# Altium PCB Main Board.PcbDoc (part 1 of 2)
Units mm, origin at the board's own origin, x right, y up, seen from the top; angles counter-clockwise.
Board outline 54.5 x 80 mm, 2 copper layers (Top Layer, Bottom Layer), stack 1.671 mm thick; 106 components, 102 nets, 471 pads, 251 vias.
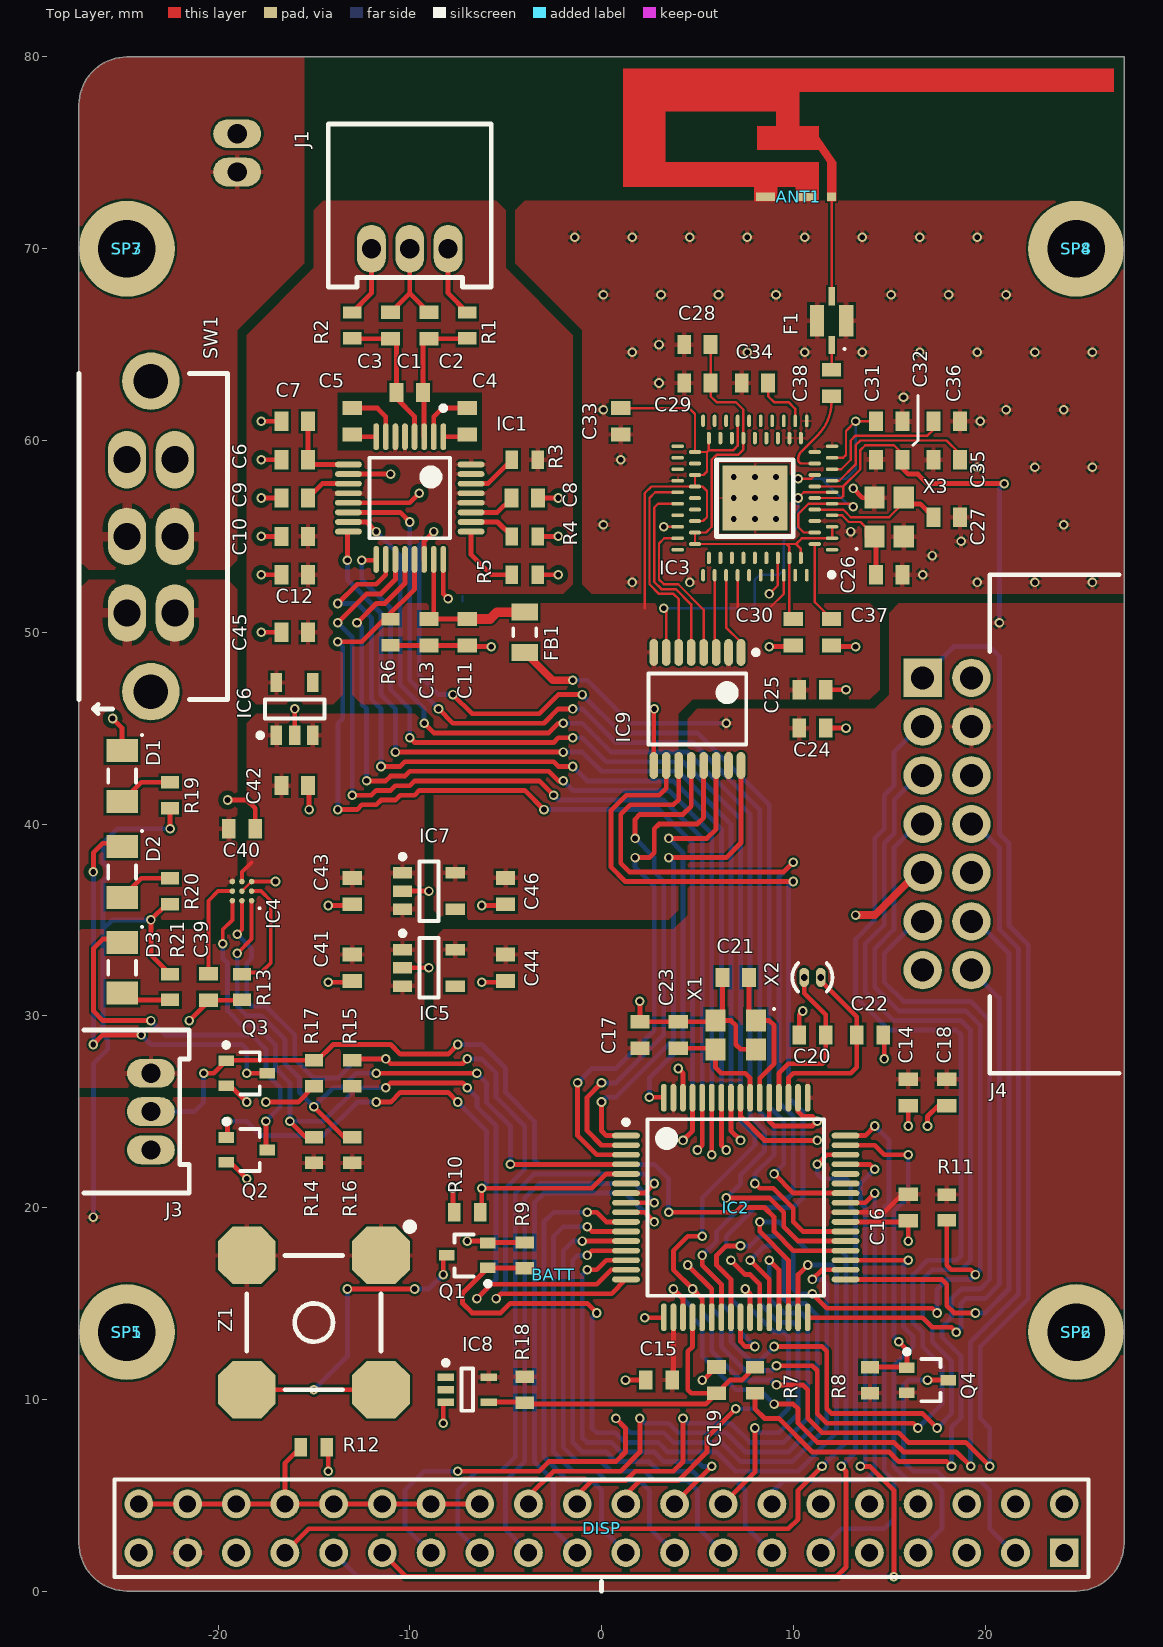
[diagram p0: Top Layer view]
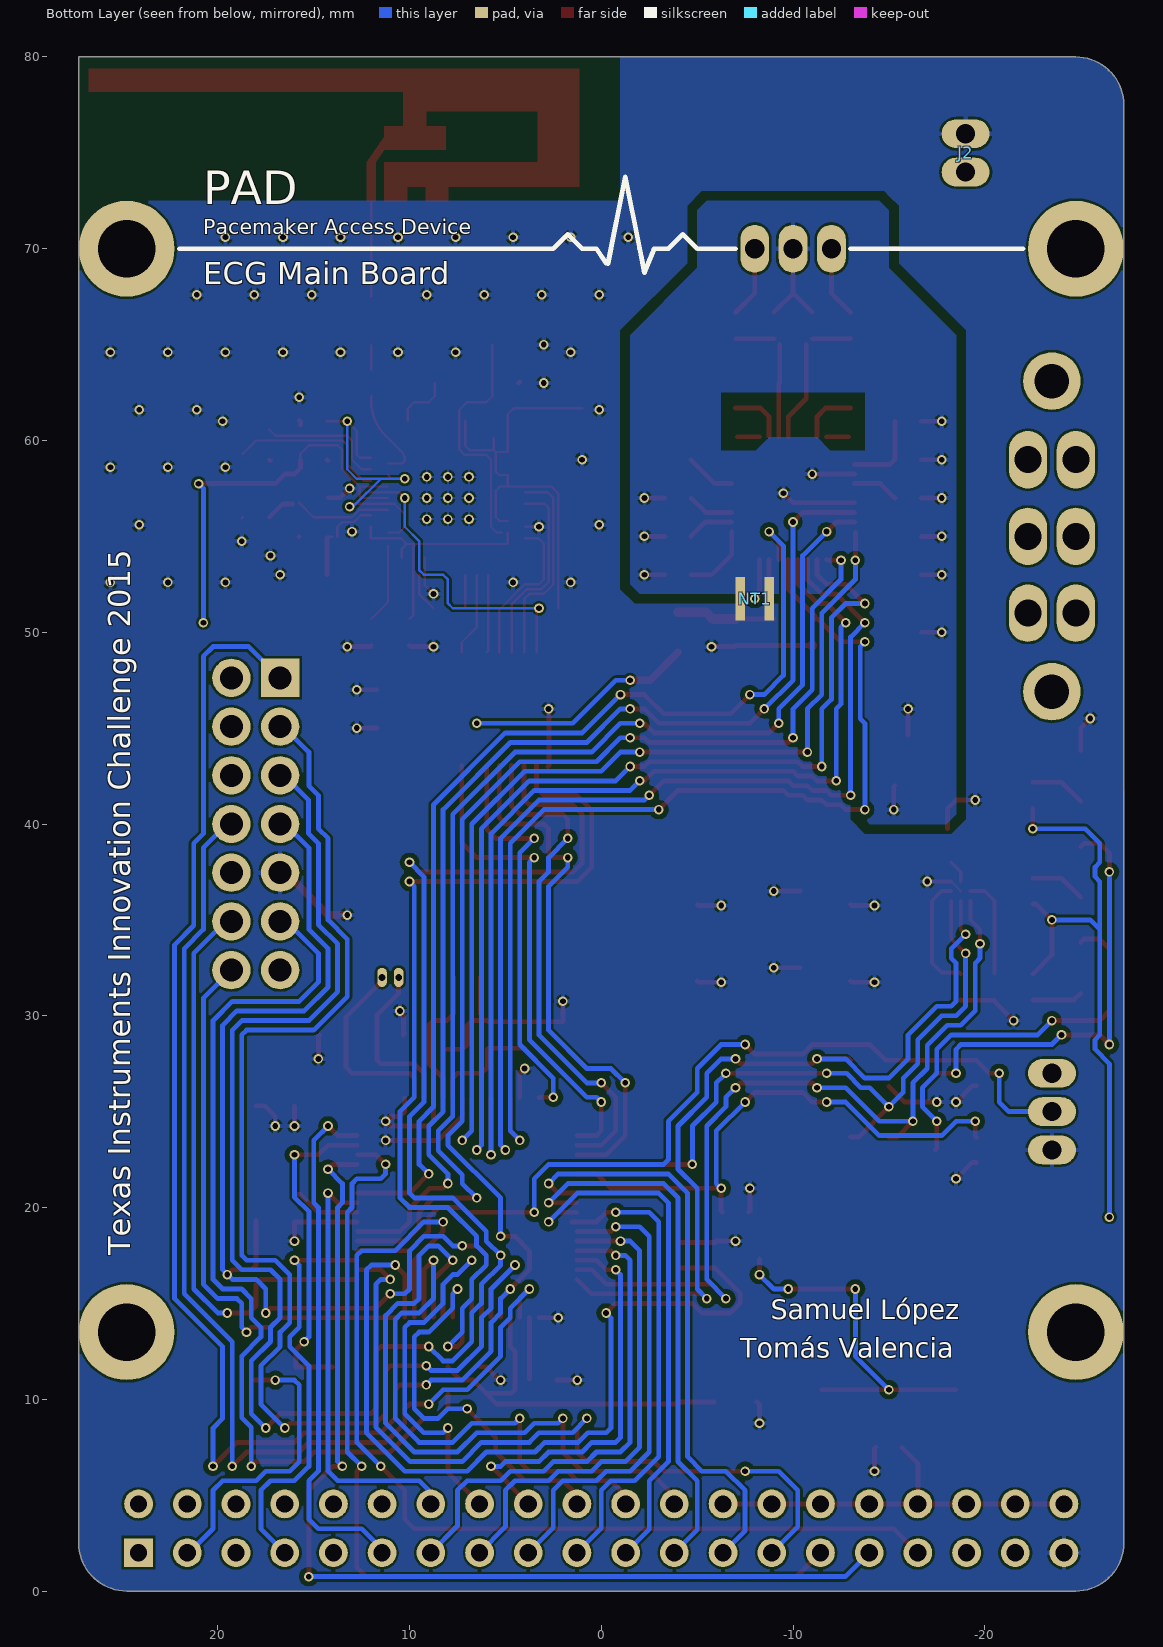
[diagram p1: Bottom Layer view, seen from below]

## Layer stack, top to bottom
Top Solder: solder mask 0.0102, Solder Resist, Dk 3.5
Top Layer: signal copper 0.0356
Dielectric 1: dielectric 1.6, FR-4, Dk 4.8
Bottom Layer: signal copper 0.0356
Bottom Solder: solder mask 0.0102, Solder Resist, Dk 3.5

## Board outline
-27.25,2.5 ccw(c-24.75,2.5) -24.75,0 24.75,0 ccw(c24.75,2.5) 27.25,2.5 27.25,80 -24.75,80 ccw(c-24.75,77.5) -27.25,77.5

## Design rules (kind name [scope] priority, off if disabled: settings)
Clearance ClearanceFuelGauge [(InNet('BIN') OR InNet('VBUS'))] p1: gap=0.125
Clearance ClearanceTrackPolygon [IsTrack vs InPolygon] p2: gap=0.125
Clearance ClearanceBLE [InNetClass('BLE')] p3: gap=0.125
Clearance ClearancePads [IsPad] p4: gap=0.125
Clearance [All] p5: gap=0.25
ComponentClearance [All] p1: gap=0.25 collisioncheckmode=3 verticalgap=0 showdistances=FALSE
Height [All] p1: minheight=0 maxheight=50 prefheight=12.7
HoleSize [All] p1: absolutevalues=TRUE maxlimit=10 minlimit=0.3 maxpercent=80.000 minpercent=20.000
MinimumSolderMaskSliver [All] p1: minsoldermaskwidth=0.1
PlaneClearance [All] p1: clearance=0.25
PlaneConnect [All] p1: planeconnectstyle=Relief reliefexpansion=0.25 reliefentries=4 reliefconductorwidth=0.25 reliefairgap=0.25
PolygonConnect PolygonConnectANT [InComponent('ANT1')] p1: connectstyle=Direct reliefconductorwidth=0.25 reliefentries=4 polygonreliefangle="90 Angle" airgapwidth=0.25
PolygonConnect PolygonConnectAGNDDGND [InComponent('NT1')] p2: connectstyle=Direct reliefconductorwidth=0.25 reliefentries=4 polygonreliefangle="90 Angle" airgapwidth=0.25
PolygonConnect PolygonConnectBATT [InComponent('SW1')] p3: connectstyle=Relief reliefconductorwidth=0.5 reliefentries=4 polygonreliefangle="90 Angle" airgapwidth=0.25
PolygonConnect PolygonConnectRF [InComponent('IC3')] p4: connectstyle=Relief reliefconductorwidth=0.125 reliefentries=4 polygonreliefangle="90 Angle" airgapwidth=0.125
PolygonConnect [All] p5: connectstyle=Relief reliefconductorwidth=0.25 reliefentries=4 polygonreliefangle="90 Angle" airgapwidth=0.125
RoutingVias [All] p1: holewidth=0.3 width=0.5 viastyle="Through Hole" minholewidth=0.3 minwidth=0.5 maxholewidth=8 maxwidth=10
SilkToSilkClearance [All] p1: silktosilkclearance=0.1
SilkToSolderMaskClearance [IsPad] p1: minsilkscreentomaskgap=0.1 clearancetoexposedcopper=TRUE
SolderMaskExpansion [All] p1: expansion=0.102
UnpouredPolygon [All] p1: allowunpoured=FALSE
Width [All] p1: maxlimit=2.5 minlimit=0.125 preferedwidth=0.25
21 further rules are at their usual default settings.

## Classes and differential pairs
component class U_Mechanical: SP1 SP2 SP3 SP4 SP5 SP6 SP7 SP8
component class "Main Board": ANT1
component class U_AFE: C1 C2 C3 C4 C5 C6 C7 C8 C9 C10 C11 C12 C13 IC1 J1 NT1 R1 R2 R3 R4 R5 R6
component class U_MCU: C14 C15 C16 C17 C18 C19 C20 C21 C22 C23 D3 DISP IC2 J4 Q1 Q2 Q4 R7 R8 R9 R10 R11 R12 R21 X1 X2 Z1
component class U_RF: C24 C25 C26 C27 C28 C29 C30 C31 C32 C33 C34 C35 C36 C37 C38 F1 IC3 IC9 X3
component class U_Supply: C39 C40 C41 C42 C43 C44 C45 C46 D1 D2 FB1 IC4 IC5 IC6 IC7 IC8 J2 J3 Q3 R13 R14 R15 R16 R17 R18 R19 R20 SW1
net class BLE: ACLK_RF_RFVDD ANTENNA DVDD NetC31_2 NetC35_2 NetC36_2 NetC37_2 NetC38_2 NetIC3_A26 NetIC3_A29 NSHUTD_RFVDD RF RF_CLKM RF_CLKP RFVDD

## Components (designator, comment, footprint, x,y, rotation, side; value= is the part's Value field where it differs from the comment)
ANT1 "2.4 GHz F-antenna" ANTENNA 12,72.715 r0 top net-tie
BATT "Batt" BATT -2.5,16.5 r180 top
C1 "6.8n" C0603 -10,62.5 r0 top
C2 "47p" C0603 -9,66 r270 top
C3 "47p" C0603 -11,66 r90 top
C4 "4.7n" C0603 -7,61 r270 top
C5 "4.7n" C0603 -13,61 r90 top
C6 "10u" C0603 -16,59 r0 top
C7 "0.1u" C0603 -16,61 r0 top
C8 "1u" C0603 -4,57 r180 top
C9 "1u" C0603 -16,57 r0 top
C10 "1u" C0603 -16,55 r0 top
C11 "1u" C0603 -7,50 r90 top
C12 "0.1u" C0603 -16,53 r0 top
C13 "0.1u" C0603 -9,50 r90 top
C14 "100n" C0603 16,26 r90 top
C15 "100n" C0603 3,11 r0 top
C16 "100n" C0603 16,20 r90 top
C17 "100n" C0603 2,29 r270 top
C18 "10u" C0603 18,26 r90 top
C19 "2.2n" C0603 6,11 r270 top
C20 "15p" C0603 11,29 r180 top
C21 "8p" C0603 7,32 r0 top
C22 "15p" C0603 14,29 r0 top
C23 "8p" C0603 4,29 r270 top
C24 "0.1u" C0603 11,45 r180 top
C25 "0.1u" C0603 11,47 r180 top
C26 "12p" C0603 15,53 r180 top
C27 "12p" C0603 18,56 r180 top
C28 "0.47u" C0603 5,65 r0 top
C29 "0.47u" C0603 5,63 r0 top
C30 "0.1u" C0603 10,50 r90 top
C31 "1u" C0603 15,61 r180 top
C32 "1u" C0603 15,59 r0 top
C33 "0.1u" C0603 1,61 r90 top
C34 "0.1u" C0603 8,63 r0 top
C35 "0.1u" C0603 18,59 r0 top
C36 "0.1u" C0603 18,61 r180 top
C37 "0.1u" C0603 12,50 r90 top
C38 "22p" C0603 12,63 r90 top
C39 "0.47u" C0603 -20.5,31.5 r90 top
C40 "1u" C0603 -18.75,39.75 r180 top
C41 "1u" C0603 -13,32.5 r90 top
C42 "1u" C0603 -16,42 r180 top
C43 "1u" C0603 -13,36.5 r90 top
C44 "1u" C0603 -5,32.5 r90 top
C45 "1u" C0603 -16,50 r0 top
C46 "1u" C0603 -5,36.5 r90 top
D1 "LED" LED3015M -25,42.5 r90 top
D2 "LED" LED3015M -25,37.5 r90 top
D3 "LED" LED3015M -25,32.5 r90 top
DISP "Touchscreen" TSCREEN_CONN 0,3.27 r90 top
F1 "RF Filter" LFB212G45SG8A127 12,66.25 r180 top
FB1 "220 ohm 100 Mhz" "0805 IND" -4,50 r90 top
IC1 "ADS1291" TSQFP50P700X700X120-32N -10,57 r270 top locked
IC2 "MSP430FR5972IPMR" MSP430FR5972 7,20 r0 top locked
IC3 "CC2560" CC2560 8,57 r180 top
IC4 "FUEL GUAGE" BQ27421 -18.75,36.5 r180 top
IC5 "LP5907" SOT23 -9,32.5 r0 top
IC6 "LP5907" SOT23 -16,46 r90 top
IC7 "LP5907" SOT23 -9,36.5 r0 top
IC8 "LMS33460" LMS33460 -7,10.5 r0 top
IC9 "TXB0106" TXB0106 5,46 r270 top locked
J1 "Electrodes" "JST PH 3 SOCKET" -10,70 r180 top locked
J2 "Batt" "JST PH 2 SOCKET" -19,75 r270 bottom locked
J3 "Charger" "JST PH 3 SOCKET" -23.5,25 r270 top locked
J4 "JTAG" "JTAG 14 PINS" 16.75,40 r270 top locked
NT1 "Net Tie" "NET TIE (AGND-DGND)" -8,51.75 r180 bottom net-tie
Q1 "2N7002" SOT65P210X110-3N -7,17.5 r180 top (schematic designator Q9)
Q2 "2N7002" SOT65P210X110-3N -18.5,23 r0 top (schematic designator Q10)
Q3 "2N7002" SOT65P210X110-3N -18.5,27 r0 top (schematic designator Q14)
Q4 "BSS84" SOT65P210X110-3N 17,11 r0 top (schematic designator Q5)
R1 "47K" R0603 -7,66 r270 top
R2 "47K" R0603 -13,66 r270 top
R3 "1M" R0603 -4,59 r0 top
R4 "100" R0603 -4,55 r0 top
R5 "100" R0603 -4,53 r0 top
R6 "1K" R0603 -11,50 r90 top
R7 "220" R0603 8,11 r90 top
R8 "10K" R0603 14,11 r270 top
R9 "10K" R0603 -4,17.5 r270 top
R10 "10K" R0603 -7,19.75 r0 top
R11 "10K" R0603 18,20 r90 top
R12 "1K" R0603 -15,7.5 r0 top
R13 "10K" R0603 -18.75,31.5 r90 top
R14 "10K" R0603 -15,23 r270 top
R15 "10K" R0603 -13,27 r270 top
R16 "10K" R0603 -13,23 r270 top
R17 "1.5M" R0603 -15,27 r90 top
R18 "470K" R0603 -4,10.5 r90 top
R19 "2.2K" R0603 -22.5,41.5 r270 top
R20 "2.2K" R0603 -22.5,36.5 r270 top
R21 "2.2K" R0603 -22.5,31.5 r90 top
SP1 "Spacer" "SPACER 11MM M3X0.5" -24.75,13.5 r90 top
SP2 "Spacer" "SPACER 11MM M3X0.5" 24.75,13.5 r90 top
SP3 "Spacer" "SPACER 11MM M3X0.5" -24.75,70 r90 top
SP4 "Spacer" "SPACER 11MM M3X0.5" 24.75,70 r90 top
SP5 "Spacer" "SPACER 7MM M3X0.5 SCREW" -24.75,13.5 r90 top
SP6 "Spacer" "SPACER 7MM M3X0.5 SCREW" 24.75,13.5 r90 top
SP7 "Spacer" "SPACER 7MM M3X0.5 SCREW" -24.75,70 r90 top
SP8 "Spacer" "SPACER 7MM M3X0.5 SCREW" 24.75,70 r90 top
SW1 "Switch SPDT" MFS201N-16-Z -23.5,55 r270 top locked
X1 "XTAL_16MHZ" XTAL_16_MHz 7,29 r270 top
X2 "XTAL_32768" XTAL_32768 11,32 r180 top
X3 "XTAL_26_MHZ" XTAL_26MHZ 15,56 r90 top
Z1 "Buzzer" KSSG74B16 -15,14 r180 top

## Footprints (in the part's own frame and the unit in brackets; to place one, negate y for a bottom-side part, rotate by r counter-clockwise, add the part's x,y. Pads: shape width x height; smd on the part's side, far side on the other; paste and mask are expansions set on the pad)
"0805 IND" [mm] "Chip Capacitor, 2-Leads, Body 2,00x1,25mm, IPC Medium Density"
  rect 0.9x1.4 smd: 1(-1.05,0) 2(1.05,0)
  silkscreen extent -0.2,-0.6 0.2,0.6, body extent -1,-0.6 1,0.6, height 0.95
ANTENNA [mm] "2.4 GHz F-antenna"
  rect 0.46x0.46 smd paste-1: 1(0,0)
  rect 1x0.46 smd paste-1: 2(-3.45,0) 2(-1.275,0)
  Top Layer region: -10.86,0.505 -10.86,6.675 14.72,6.675 14.72,5.465 -1.68,5.465 -1.68,3.665 -0.68,3.665 -0.68,3.125 0.23,1.795 0.23,-0.235 -0.23,-0.235 -0.23,1.795 -0.68,2.455 -3.88,2.455 -3.88,3.665 -2.88,3.665 -2.88,4.465 -8.68,4.465 -8.68,1.795 -0.68,1.795 -0.68,-0.235 -1.878,-0.235 -1.878,0.505 -2.841,0.505 -2.841,-0.235 -4.027,-0.235 -4.027,0.505
BATT [mm]
  body extent -17,-50 17,0, height 6
BQ27421 [mm] "BGA, 9-Leads, Body 1,62x1,58mmx0,63mm, Pitch 0,50mm"
  round 0.29 smd mask+0.05: A1(-0.5,0.5) A2(0,0.5) A3(0.5,0.5) B1(-0.5,0) B2(0,0) B3(0.5,0) C1(-0.5,-0.5) C2(0,-0.5) C3(0.5,-0.5)
  silkscreen extent -0.96,0.85 -0.87,0.94, body extent -0.81,-0.79 0.81,0.79, height 0.63
C0603 [mm] "Chip Capacitor, 2-Leads, Body 1,55x0,85mm, IPC Medium Density"
  rect 0.72x1 smd: 1(-0.69,0) 2(0.69,0)
  body extent -0.8,-0.48 0.8,0.47, height 0.5
CC2560 [mm] "Double Row QFN, 76-Leads, Body 8,00x8,00mm, Pitch 0,60mm, Thermal Pad 3,40x3,40mm, IPC Low Density"
  oval 0.65x0.2 smd: A1(-4.025,2.7) A2(-4.025,2.1) A3(-4.025,1.5) A4(-4.025,0.9) A5(-4.025,0.3) A6(-4.025,-0.3) A7(-4.025,-0.9) A8(-4.025,-1.5) A9(-4.025,-2.1) A10(-4.025,-2.7) A21(4.025,-2.7) A22(4.025,-2.1) A23(4.025,-1.5) A24(4.025,-0.9) A25(4.025,-0.3) A26(4.025,0.3) A27(4.025,0.9) A28(4.025,1.5) A29(4.025,2.1) A30(4.025,2.7) B1(-3.125,2.4) B2(-3.125,1.8) B3(-3.125,1.2) B4(-3.125,0.6) B5(-3.125,0) B6(-3.125,-0.6) B7(-3.125,-1.2) B8(-3.125,-1.8) B9(-3.125,-2.4) B19(3.125,-2.4) B20(3.125,-1.8) B21(3.125,-1.2) B22(3.125,-0.6) B23(3.125,0) B24(3.125,0.6) B25(3.125,1.2) B26(3.125,1.8) B27(3.125,2.4)
  oval 0.2x0.65 smd: A11(-2.7,-4.025) A12(-2.1,-4.025) A13(-1.5,-4.025) A14(-0.9,-4.025) A15(-0.3,-4.025) A16(0.3,-4.025) A17(0.9,-4.025) A18(1.5,-4.025) A19(2.1,-4.025) A20(2.7,-4.025) A31(2.7,4.025) A32(2.1,4.025) A33(1.5,4.025) A34(0.9,4.025) A35(0.3,4.025) A36(-0.3,4.025) A37(-0.9,4.025) A38(-1.5,4.025) A39(-2.1,4.025) A40(-2.7,4.025) B10(-2.4,-3.125) B11(-1.8,-3.125) B12(-1.2,-3.125) B13(-0.6,-3.125) B14(0,-3.125) B15(0.6,-3.125) B16(1.2,-3.125) B17(1.8,-3.125) B18(2.4,-3.125) B28(2.4,3.125) B29(1.8,3.125) B30(1.2,3.125) B31(0.6,3.125) B32(0,3.125) B33(-0.6,3.125) B34(-1.2,3.125) B35(-1.8,3.125) B36(-2.4,3.125)
  rect 3.4x3.4 smd: Pad(0,0)
  silkscreen extent -4.13,-2 2,4.12, body extent -4.05,-4.05 4.05,4.05, height 0.9
"JST PH 2 SOCKET" [mm] "JST PH 2 Pin Socket"
  oval 1.5x2.5 hole 1: 1(-1,0) 2(1,0)
  body extent -3,-6.25 3,1.75, height 4.8
"JST PH 3 SOCKET" [mm] "JST PH 3 Pin Socket"
  oval 1.5x2.5 hole 1: 1(-2,0) 2(0,0) 3(2,0)
  silkscreen extent -4.25,-6.5 4.25,2, body extent -4,-6.25 4,1.75, height 4.8
"JTAG 14 PINS" [mm] "7X2 PIN Header 90º JTAG"
  rect 2x2 hole 1.2: 1(-7.62,0)
  round 2 hole 1.2: 2(-7.62,2.54) 3(-5.08,0) 4(-5.08,2.54) 5(-2.54,0) 6(-2.54,2.54) 7(0,0) 8(0,2.54) 9(2.54,0) 10(2.54,2.54) 11(5.08,0) 12(5.08,2.54) 13(7.62,0) 14(7.62,2.54)
  silkscreen extent -13,3.5 13,10.25, body extent -12.87,-0.25 12.87,13, height 9.25
KSSG74B16 [mm] "Magnetic Buzzer"
  oct 3x3 smd: 1(-3.5,-3.5) 1(3.5,-3.5) 2(-3.5,3.5) 2(3.5,3.5)
  silkscreen extent -5.13,-5.12 3.5,3.5, body extent -4.25,-4.25 4.25,4.25, height 3
LED3015M [mm] "Chip Diode, 2-Leads, Body 3,00x1,50mm, IPC Medium Density"
  rect 1.2x1.65 smd: 1(-1.325,0) 2(1.325,0)
  silkscreen extent -0.35,-1.09 2.19,0.72, body extent -1.5,-0.75 1.5,0.75, height 0.9
LFB212G45SG8A127 [mm] "DFN, 4-Leads, Body 2,00x1,25mm, Pitch 1,50mm, IPC Medium Density"
  rect 0.75x1.65 smd mask+0.05: 1(-0.762,0) 3(0.762,0)
  rect 0.35x0.95 smd mask+0.05: 2(0,-1.27) 4(0,1.27)
  silkscreen extent -0.72,1.43 -0.63,1.52, body extent -0.67,-1.07 0.67,1.08, height 1
LMS33460 [mm] "SOT23, 5-Leads, Body 2,00x2,10mm, Pitch 0,65mm, IPC Medium Density"
  rect 0.85x0.4 smd mask+0.06: 1(-1.125,0.65) 2(-1.125,0) 3(-1.125,-0.65) 4(1.125,-0.65) 5(1.125,0.65)
  silkscreen extent -1.25,-1.1 0.3,1.52, body extent -0.7,-1.07 0.7,1.08, height 1.1
MFS201N-16-Z [mm] "DPDT Switch 30V 1A"
  oval 3x2 hole 1.4: 1(-4,-1.25) 2(0,-1.25) 3(4,-1.25) 4(-4,1.25) 5(0,1.25) 6(4,1.25)
  round 3 hole 1.8: ""(-8.1,0) ""(8.1,0)
  silkscreen extent -8.5,-3.75 9.25,4, body extent -8.4,-10.85 8.4,3.75, height 9
MSP430FR5972 [mm] "TSQFP, 64-Leads, Body 10,00x10,00mm, Pitch 0,50mm, IPC Medium Density"
  oval 1.45x0.3 smd: 1(-5.725,3.75) 2(-5.725,3.25) 3(-5.725,2.75) 4(-5.725,2.25) 5(-5.725,1.75) 6(-5.725,1.25) 7(-5.725,0.75) 8(-5.725,0.25) 9(-5.725,-0.25) 10(-5.725,-0.75) 11(-5.725,-1.25) 12(-5.725,-1.75) 13(-5.725,-2.25) 14(-5.725,-2.75) 15(-5.725,-3.25) 16(-5.725,-3.75) 33(5.725,-3.75) 34(5.725,-3.25) 35(5.725,-2.75) 36(5.725,-2.25) 37(5.725,-1.75) 38(5.725,-1.25) 39(5.725,-0.75) 40(5.725,-0.25) 41(5.725,0.25) 42(5.725,0.75) 43(5.725,1.25) 44(5.725,1.75) 45(5.725,2.25) 46(5.725,2.75) 47(5.725,3.25) 48(5.725,3.75)
  oval 0.3x1.45 smd: 17(-3.75,-5.725) 18(-3.25,-5.725) 19(-2.75,-5.725) 20(-2.25,-5.725) 21(-1.75,-5.725) 22(-1.25,-5.725) 23(-0.75,-5.725) 24(-0.25,-5.725) 25(0.25,-5.725) 26(0.75,-5.725) 27(1.25,-5.725) 28(1.75,-5.725) 29(2.25,-5.725) 30(2.75,-5.725) 31(3.25,-5.725) 32(3.75,-5.725) 49(3.75,5.725) 50(3.25,5.725) 51(2.75,5.725) 52(2.25,5.725) 53(1.75,5.725) 54(1.25,5.725) 55(0.75,5.725) 56(0.25,5.725) 57(-0.25,5.725) 58(-0.75,5.725) 59(-1.25,5.725) 60(-1.75,5.725) 61(-2.25,5.725) 62(-2.75,5.725) 63(-3.25,5.725) 64(-3.75,5.725)
  silkscreen extent -5.85,-4.6 4.6,4.6, body extent -5,-5 5,5, height 1.6
"NET TIE (AGND-DGND)" [mm] "Net Tie"
  rect 0.5x1.25 smd paste-1: 1(-0.75,0.5) 1(0.75,0.5) 2(-0.75,-0.5) 2(0.75,-0.5)
  Top Layer lines w0.125: 0.75,-0.125 0.75,0.125 ; -0.75,-0.125 -0.75,0.125
R0603 [mm] "Chip Resistor, 2-Leads, Body 1,55x0,85mm, IPC Medium Density"
  rect 0.65x0.95 smd: 1(-0.675,0) 2(0.675,0)
  body extent -0.8,-0.48 0.8,0.48, height 0.5
SOT23 [mm] "SOT23, 5-Leads, Body 2,90x2,80mm, Pitch 0,95mm, IPC Medium Density"
  rect 1x0.6 smd: 1(-1.375,0.95) 2(-1.375,0) 3(-1.375,-0.95) 4(1.375,-0.95) 5(1.375,0.95)
  silkscreen extent -1.5,-1.55 0.5,1.92, body extent -0.88,-1.52 0.87,1.53, height 1.45
SOT65P210X110-3N [mm] "SOT23, 3-Leads, Body 2,00x2,10mm, Pitch 0,65mm, IPC Medium Density"
  rect 0.8x0.55 smd: 1(-1.075,0.65) 2(-1.075,-0.65) 3(1.075,0)
  silkscreen extent -1.2,-1.1 0.67,1.6, body extent -0.67,-1.1 0.67,1.1, height 1.1
"SPACER 7MM M3X0.5 SCREW" [mm] "PCB Spacer mm M3x0.5 Screw"
  body extent -2.89,-2.5 2.89,2.5, height 7
"SPACER 11MM M3X0.5" [mm] "PCB Spacer 11mm M3x0.5"
  body extent -2.89,-2.5 2.89,2.5, height 11
TSCREEN_CONN [mm]
  rect 1.5x1.5 hole 0.9: 1(-1.27,-24.13)
  round 1.5 hole 0.9: 2(-1.27,-21.59) 3(-1.27,-19.05) 4(-1.27,-16.51) 5(-1.27,-13.97) 6(-1.27,-11.43) 7(-1.27,-8.89) 8(-1.27,-6.35) 9(-1.27,-3.81) 10(-1.27,-1.27) 11(-1.27,1.27) 12(-1.27,3.81) 13(-1.27,6.35) 14(-1.27,8.89) 15(-1.27,11.43) 16(-1.27,13.97) 17(-1.27,16.51) 18(-1.27,19.05) 19(-1.27,21.59) 20(-1.27,24.13) 21(1.27,24.13) 22(1.27,21.59) 23(1.27,19.05) 24(1.27,16.51) 25(1.27,13.97) 26(1.27,11.43) 27(1.27,8.89) 28(1.27,6.35) 29(1.27,3.81) 30(1.27,1.27) 31(1.27,-1.27) 32(1.27,-3.81) 33(1.27,-6.35) 34(1.27,-8.89) 35(1.27,-11.43) 36(1.27,-13.97) 37(1.27,-16.51) 38(1.27,-19.05) 39(1.27,-21.59) 40(1.27,-24.13)
  silkscreen extent -2.54,-25.4 2.54,25.4, body extent -2.54,-25.4 2.54,25.4, height 8.5
TSQFP50P700X700X120-32N [mm] "TSQFP, 32-Leads, Body 5,00x5,00mm, Pitch 0,50mm, IPC Medium Density"
  oval 1.4x0.3 smd: 1(-3.2,1.75) 2(-3.2,1.25) 3(-3.2,0.75) 4(-3.2,0.25) 5(-3.2,-0.25) 6(-3.2,-0.75) 7(-3.2,-1.25) 8(-3.2,-1.75) 17(3.2,-1.75) 18(3.2,-1.25) 19(3.2,-0.75) 20(3.2,-0.25) 21(3.2,0.25) 22(3.2,0.75) 23(3.2,1.25) 24(3.2,1.75)
  oval 0.3x1.4 smd: 9(-1.75,-3.2) 10(-1.25,-3.2) 11(-0.75,-3.2) 12(-0.25,-3.2) 13(0.25,-3.2) 14(0.75,-3.2) 15(1.25,-3.2) 16(1.75,-3.2) 25(1.75,3.2) 26(1.25,3.2) 27(0.75,3.2) 28(0.25,3.2) 29(-0.25,3.2) 30(-0.75,3.2) 31(-1.25,3.2) 32(-1.75,3.2)
  silkscreen extent -4.81,-2.1 2.1,2.1, body extent -2.5,-2.5 2.5,2.5, height 1.2
TXB0106 [mm] "TSOP, 16-Leads, Body 5,00x4,40mm, Pitch 0,65mm, IPC Medium Density"
  oval 1.4x0.45 smd: 1(-2.95,2.275) 2(-2.95,1.625) 3(-2.95,0.975) 4(-2.95,0.325) 5(-2.95,-0.325) 6(-2.95,-0.975) 7(-2.95,-1.625) 8(-2.95,-2.275) 9(2.95,-2.275) 10(2.95,-1.625) 11(2.95,-0.975) 12(2.95,-0.325) 13(2.95,0.325) 14(2.95,0.975) 15(2.95,1.625) 16(2.95,2.275)
  silkscreen extent -3.07,-2.55 1.85,3.17, body extent -2.25,-2.55 2.25,2.55, height 1.2
XTAL_16_MHz [mm] "DFN, 4-Leads, Body 3,10x2,50mm, Pitch 1,50mm, IPC Medium Density"
  rect 1.15x1.05 smd: 1(-0.75,1.05) 2(-0.75,-1.05) 3(0.75,-1.05) 4(0.75,1.05)
  silkscreen extent -1.4,1.95 -1.3,2.05, body extent -1.35,-1.6 1.35,1.6, height 0.75
XTAL_26MHZ [mm] "DFN, 4-Leads, Body 2,50x3,20mm, Pitch 2,20mm, IPC Medium Density"
  rect 1.15x1.05 smd: 1(-1.016,0.762) 2(-1.016,-0.762) 3(1.016,-0.762) 4(1.016,0.762)
  silkscreen extent -1.7,1.65 -1.6,1.75, body extent -1.65,-1.3 1.65,1.3, height 0.9
XTAL_32768 [mm]
  oval 0.5x1 hole 0.35: 1(-0.432,0) 2(0.432,0)
  silkscreen extent -1.05,-0.74 1.05,0.74, body extent -1.05,-1.05 1.05,1.05, height 6.2

## Part data
ANT1: library part Antenna
C1 C2 C3 C4 C5 C6 C7 C8 C9 C10 C11 C12 C13 C14 C15 C16 C17 C18 C19 C20 C21 C22 C23 C24 C25 C26 C27 C28 C29 C30 C31 C32 C33 C34 C35 C36 C37 C38 C39 C40 C41 C42 C43 C44 C45 C46: library part Capacitor, "Capacitor"
F1: library part LFB212G45SG8A127, "RF Filter 2.4 GHz"
FB1: library part Ferrita, "INDUCTOR, 0.04OHM, 3A, 0805"
IC4: library part BQ27421
J1 J3: library part "JST PH 3 Pin Socket", "JST PH 3 Pin Socket"
J2: library part "JST PH 2 Pin Socket", "JST PH 2 Pin Socket"
J4: library part "JTAG 14 Pins", "JTAG 7X2 Pin Header 90º"
NT1: "Net Tie (AGND-DGND)"
Q1 Q2 Q3: "Transistor, MOSFET, N-Channel, 60V, 300mA"
Q4: "Transistor, MOSFET, P-Channel, 60V, 300mA"
R1 R2 R3 R4 R5 R6 R7 R8 R9 R10 R11 R12 R13 R14 R15 R16 R17 R18 R19 R20 R21: library part Resistor, "Resistor"
SP1 SP2 SP3 SP4: library part "Spacer 11mm M3x0.5", "PCB Spacer 11mm M3x0.5"
SP5 SP6 SP7 SP8: library part "Spacer 7mm M3x0.5 Screw", "PCB Spacer 7mm M3x0.5 Screw"
SW1: library part MFS201N-16-Z
X1: library part XTAL_16_MHz
X3: library part XTAL_26_MHz
Z1: "Magnetic Buzzer 2.7 KHz"

## Free pads (board coordinates)
  round 5 hole 3: ""(-24.75,13.5) ""(-24.75,70) ""(24.75,13.5) ""(24.75,70)

## Via types
v1: diameter 0.5, hole 0.3, Top Layer to Bottom Layer, 215 vias
v2: diameter 0.5, hole 0.3, Top Layer to Bottom Layer, tented both sides, 36 vias

## Nets (pads, with @x,y where several pads share a name; then routed paths per layer and width w, separated by ;. In a path a pad name is that pad's centre, name@x,y a point inside that pad or via, vN(x,y) a via of type N, cw(c..) or ccw(c..) an arc to the next point about the centre after c; other vN are vias at no path point)
ACLK_RF_DVDD: IC2.23 IC9.11 J4.5 | length 107.7
  Top Layer w0.25: IC9.11@4.025,43.05 4.025,41.275 3.75,41 3.207,41 1.5,41 1,40.5 1,37.957 1.457,37.5 9.5,37.5 v1(10,38) ; v1(5.25,17.5) 5.25,17 6.25,16 IC2.23@6.25,14.275 ; v1(9,12.75) 11.5,12.75 11.75,12.5 11.75,9.5 12,9.25 16.75,9.25 v1(17.5,8.5)
  Bottom Layer w0.25: v1(9,12.75) 8.25,12 7.75,12 6.75,13 6.75,13.5 6.75,14.5 6.25,15 6.25,16 5.25,17 v1(5.25,17.5) 6,18.25 6,18.75 7.75,20.5 9.75,20.5 10,20.75 10,24.75 9.25,25.5 9.25,37.25 v1(10,38) ; J4.5@16.75,42.54 16.54,42.54 15.27,41.27 15.27,39.52 14.75,39 14.75,34.75 13.75,33.75 13.75,31.25 15.25,29.75 18.75,29.75 19.25,29.25 19.25,17.25 18.75,16.75 17.25,16.75 16.75,16.25 16.75,14.25 17.25,13.75 17.25,13 18.25,12 18.25,9.25 v1(17.5,8.5)
ACLK_RF_RFVDD: IC3.A25 IC9.6 | length 10.7
  Top Layer w0.125: IC3.A25@3.975,57.3 2.8,57.3 2.5,57 2.5,52.5 3,52 3.75,52 4.025,51.725 IC9.6@4.025,48.95
AFE_CLK: IC1.17 IC2.21 J4.1 | length 129.9
  Top Layer w0.25: v1(-12.5,53.75) -11.8,53.75 IC1.17@-11.75,53.8 ; v1(-10,44.5) -9.75,44.25 -2.5,44.25 -2.25,44.5 v1(-1.5,44.5) ; IC2.21@5.25,14.275 5.25,15.25 v1(4.75,15.75) 3.75,16.75 3.75,17.75 4.5,18.5 v1(5.25,18.5) ; v1(9.125,10.75) 10.5,10.75 10.75,10.5 10.75,9 11.5,8.25 15.5,8.25 16,7.75 19,7.75 v1(20.25,6.5)
  Bottom Layer w0.25: v1(-12.5,53.75) -12.5,52.75 -11,51.25 -11,47 -10,46 v1(-10,44.5) ; v1(-1.5,44.5) -1,44.5 0.25,43.25 4.25,43.25 7.25,40.25 7.25,24.5 8,23.75 8,23.25 5.25,20.5 v1(5.25,18.5) ; v1(4.75,15.75) 5.25,15.25 5.25,14.5 5.75,14 5.75,12.5 7.25,11 8.875,11 v1(9.125,10.75) ; J4.1@16.75,47.62 18.38,49.25 20.25,49.25 20.75,48.75 20.75,39.5 21.25,39 21.25,34.75 21.25,34.707 22.25,33.707 22.25,15.25 19.75,12.75 19.75,9 20.25,8.5 v1(20.25,6.5)
AFE_CLKSEL: IC1.14 IC2.38 | length 59.7
  Top Layer w0.25: IC1.14@-13.2,56.25 -10.5,56.25 v1(-10,55.75) ; v1(-8.5,46) -7.75,45.25 -3,45.25 -2.25,46 v1(-1.5,46) ; v1(8,21.25) 8.25,21 8.957,21 10,19.957 10,19.5 10,19.25 10.5,18.75 IC2.38@12.725,18.75
  Bottom Layer w0.25: v1(-10,55.75) -10,47.5 v1(-8.5,46) ; v1(-1.5,46) -1,46 0.75,44.25 4.75,44.25 8.25,40.75 8.25,25 9,24.25 9,22.75 8,21.75 v1(8,21.25)
AFE_CS: IC1.18 IC2.58 | length 52.9
  Top Layer w0.25: v1(-13.75,51.5) -12.75,52.5 -11.75,52.5 -11.25,53 IC1.18@-11.25,53.8 ; v1(-11.5,43) -10.5,43 -10.25,43.25 -2.5,43.25 -2.25,43 v1(-1.5,43) ; IC2.58@6.25,25.725 6.25,23.25 v1(6.5,23)
  Bottom Layer w0.25: v1(-13.75,51.5) -12.75,51.5 -12,50.75 -12,46.5 -11.5,46 v1(-11.5,43) ; v1(-1.5,43) -0.75,42.25 3.75,42.25 6.25,39.75 6.25,23.25 v1(6.5,23)
AFE_DIN: IC1.19 IC2.60 | length 53.4
  Top Layer w0.25: v1(-13.75,50.5) -12.25,52 -11.5,52 -10.75,52.75 IC1.19@-10.75,53.8 ; v1(-13,41.5) -12,41.5 -11.75,41.75 -11,41.75 -10.75,42 -10,42 -9.75,42.25 -3.25,42.25 -2.543,41.543 -2.543,41.5 -2.5,41.543 v1(-2.5,41.5) ; v1(5,23) 5.25,23.25 IC2.60@5.25,25.725
  Bottom Layer w0.25: v1(-13.75,50.5) -13,49.75 v1(-13,41.5) ; v1(-2.5,41.5) -2.25,41.25 3.25,41.25 5.25,39.25 5.25,23.25 v1(5,23)
AFE_DOUT: IC1.21 IC2.61 R6.2 | length 54.2
  Top Layer w0.25: v1(-13.75,40.75) -12.75,40.75 -12.5,41 -11.75,41 -11.5,41.25 -10.75,41.25 -10.5,41.5 -9.75,41.5 -9.5,41.75 -4,41.75 v1(-3,40.75) ; v1(-13.75,49.5) -12.5,49.5 -11.325,50.675 R6.2@-11,50.675 -11.163,50.838 -9.75,52.25 IC1.21@-9.75,53.8 ; v1(4.25,23.5) 4.75,24 IC2.61@4.75,25.725
  Bottom Layer w0.25: v1(-13.75,40.75) -13.75,45.25 -13.5,45.5 -13.5,49.25 v1(-13.75,49.5) ; v1(-3,40.75) 3,40.75 4.75,39 4.75,24 v1(4.25,23.5)
AFE_DRDY: IC1.22 IC2.42 | length 55.2
  Top Layer w0.25: IC1.22@-9.25,53.8 -9.25,54.75 v1(-8.75,55.25) ; v1(-7.75,46.75) -6.75,45.75 -3.25,45.75 -2.25,46.75 v1(-1,46.75) ; v1(9,21.75) 10,20.75 IC2.42@12.725,20.75
  Bottom Layer w0.25: v1(-8.75,55.25) -9.5,54.5 -9.5,47.75 -8.5,46.75 v1(-7.75,46.75) ; v1(-1,46.75) 1,44.75 5,44.75 8.75,41 8.75,25.25 9.5,24.5 9.5,22.25 v1(9,21.75)
AFE_ELECT+: J1.3 R2.1 | length 3.7
  Top Layer w0.25: R2.1@-13,66.675 -12,67.675 J1.3@-12,70
AFE_ELECT-: J1.1 R1.1 | length 3.7
  Top Layer w0.25: J1.1@-8,70 -8,67.675 R1.1@-7,66.675
AFE_RESET: IC1.15 IC2.37 | length 60.8
  Top Layer w0.25: IC1.15@-13.2,55.75 -12.25,55.75 v1(-11.75,55.25) ; v1(-9.25,45.25) -8.75,44.75 -2.75,44.75 -2.25,45.25 v1(-2,45.25) ; v1(6.5,20.5) 8.75,20.5 9.5,19.75 9.5,19 10.25,18.25 IC2.37@12.725,18.25
  Bottom Layer w0.25: v1(-11.75,55.25) -10.5,54 -10.5,47.25 -9.25,46 v1(-9.25,45.25) ; v1(-2,45.25) -1,45.25 0.5,43.75 4.5,43.75 7.75,40.5 7.75,24.75 8.5,24 8.5,22.957 7.25,21.707 7.25,21.25 v1(6.5,20.5)
AFE_SCLK: IC1.20 IC2.59 | length 52.3
  Top Layer w0.25: v1(-12.75,50.5) -11.75,51.5 -11.293,51.5 -10.25,52.543 IC1.20@-10.25,53.8 ; v1(-12.25,42.25) -11.25,42.25 -11,42.5 -10.25,42.5 -10,42.75 -2.75,42.75 -2.25,42.25 v1(-2,42.25) ; v1(5.75,22.75) IC2.59@5.75,25.725
  Bottom Layer w0.25: v1(-12.75,50.5) -12.5,50.25 -12.5,46.25 -12.25,46 v1(-12.25,42.25) ; v1(-2,42.25) -1.5,41.75 3.5,41.75 5.75,39.5 v1(5.75,22.75)
AFE_START: IC1.16 IC2.57 | length 50.7
  Top Layer w0.25: v1(-13.25,53.75) IC1.16@-13.25,55.2 ; v1(-10.75,43.75) v1(-2,43.75) ; IC2.57@6.75,25.725 6.75,24 v1(7.25,23.5)
  Bottom Layer w0.25: v1(-13.25,53.75) -13.25,52.75 -11.5,51 -11.5,46.75 -10.75,46 v1(-10.75,43.75) ; v1(-2,43.75) -1,43.75 0,42.75 4,42.75 6.75,40 6.75,24 v1(7.25,23.5)
AFEVDD: C11.2 C13.2 FB1.2 IC1.23 | length 8.4
  Top Layer w0.25: IC1.23@-8.75,53.8 -8.75,50.94 C13.2@-9,50.69 C11.2@-7,50.69
  Top Layer w0.5: C11.2@-7,50.69 -5.81,50.69 -5.45,51.05 FB1.2@-4,51.05
AGND: C2.1 C3.2 C6.1 C7.1 C8.1 C9.1 C10.1 C12.1 C42.1 C45.1 IC1.10 IC1.13 IC1.24 IC6.2 J1.2 NT1.1 R4.2 R5.2 | length 25.6
  Top Layer w0.25: v1(-17.75,50) C45.1@-16.69,50 ; v1(-17.75,53) C12.1@-16.69,53 ; v1(-17.75,55) C10.1@-16.69,55 ; v1(-17.75,57) C9.1@-16.69,57 ; v1(-17.75,59) C6.1@-16.69,59 ; v1(-17.75,61) C7.1@-16.69,61 ; IC6.2@-16,44.625 v1(-16,46) ; C42.1@-15.31,42 -15.25,41.94 v1(-15.25,40.75) ; IC1.13@-13.2,56.75 -10,56.75 v1(-9.5,57.25) ; IC1.10@-13.2,58.25 v1(-11,58.25) ; C3.2@-11,66.69 -10,67.69 ; J1.2@-10,70 -10,67.69 ; C2.1@-9,66.69 -10,67.69 ; IC1.24@-8.25,53.8 -8.25,52 v1(-8,51.75) ; R5.2@-3.325,53 v1(-2.25,53) ; R4.2@-3.325,55 v1(-2.25,55) ; C8.1@-3.31,57 v1(-2.25,57)
ANTENNA: ANT1.1 F1.2 | length 5.2
  Top Layer w0.127: F1.2@12,67.52 ANT1.1@12,72.715
AVDD: C10.2 C12.2 C45.2 IC1.5 IC1.6 IC1.12 IC1.28 IC1.29 IC1.31 IC1.32 IC6.5 R3.2
BATT+: J2.2 SW1.2 SW1.5
BIN: IC4.B1 R13.2 | length 6.2
  Top Layer w0.2: R13.2@-18.75,32.175 -18.675,32.25 -17.75,32.25 -17.25,32.75 -17.25,36 -17.75,36.5 IC4.B1@-18.25,36.5
BSL_RX: IC2.32 J4.14 | length 29.1
  Top Layer w0.25: IC2.32@10.75,14.275 10.775,14.25 16.75,14.25 17.25,13.75 18.25,13.75 v1(18.5,13.5)
  Bottom Layer w0.25: v1(18.5,13.5) 18.75,13.75 18.75,15 19,15.25 20,15.25 20.75,16 20.75,30.92 J4.14@19.29,32.38
BSL_TX: IC2.33 J4.12 | length 30.6
  Top Layer w0.25: IC2.33@12.725,16.25 17.75,16.25 18,16 18,14.884 18.384,14.5 v1(19.5,14.5)
  Bottom Layer w0.25: J4.12@19.29,34.92 19.58,34.92 21.25,33.25 21.25,15.75 20,14.5 v1(19.5,14.5)
BUZZER: IC2.31 Q1.1 R9.2 | length 45.4
  Top Layer w0.25: Q1.1@-6.025,16.75 -7.25,15.525 -7.25,15 -6.75,14.5 -5.25,14.5 -4.75,15 -0.75,15 v1(-0.25,14.5) ; Q1.1@-5.925,16.85 R9.2@-4.025,16.85 ; IC2.31@10.25,14.275 10.25,16.5 v1(10.75,17)
  Bottom Layer w0.25: v1(-0.25,14.5) -0.5,14.25 -0.5,8.5 -0.25,8.25 0.707,8.25 1.207,7.75 2.957,7.75 3.457,7.25 4.5,7.25 6,7.25 7,6.25 10.25,6.25 12.25,8.25 12.25,16.75 12,17 v1(10.75,17)
CHARGING: IC2.36 J3.2 Q3.1 R17.2 | length 47.5
  Top Layer w0.25: J3.2@-23.5,25 J3.2@-23,25 ; v1(-20.75,27) -20.225,27 Q3.1@-19.575,27.65 -19.55,27.675 R17.2@-15,27.675 -14.825,27.675 -14,28.5 -11,28.5 -10.5,28 -8,28 v1(-7.5,28.5) ; v1(3.5,19.75) 7,19.75 7.25,20 8.5,20 9,19.5 9,18.75 10,17.75 IC2.36@12.725,17.75
  Bottom Layer w0.25: J3.2@-23.5,25 -21.25,25 -20.75,25.5 v1(-20.75,27) ; v1(-7.5,28.5) -6.25,28.5 -5,27.25 -5,26 -3.5,24.5 -3.5,22.5 -3.25,22.25 2.75,22.25 3.5,21.5 v1(3.5,19.75)
CTS: IC2.2 IC9.12 | length 26.6
  Top Layer w0.25: v1(0,26.5) -0.75,25.75 -0.75,24 0,23.25 IC2.2@1.275,23.25 ; v1(1.75,39.25) 1.75,40.25 2,40.5 4.25,40.5 4.675,40.925 IC9.12@4.675,43.05
  Bottom Layer w0.25: v1(0,26.5) 0.75,26.5 3.25,29 3.25,37 2.75,37.5 2.75,38.25 v1(1.75,39.25)